# Altium PCB PCB_SmartTerminal_2024-09-08.pcbdoc
Units mil, origin at the board's own origin, x right, y up, seen from the top; angles counter-clockwise.
Board outline 3435 x 4235 mil, 2 copper layers (Top Layer, Bottom Layer); 13 components, 18 nets, 138 pads, 15 vias.
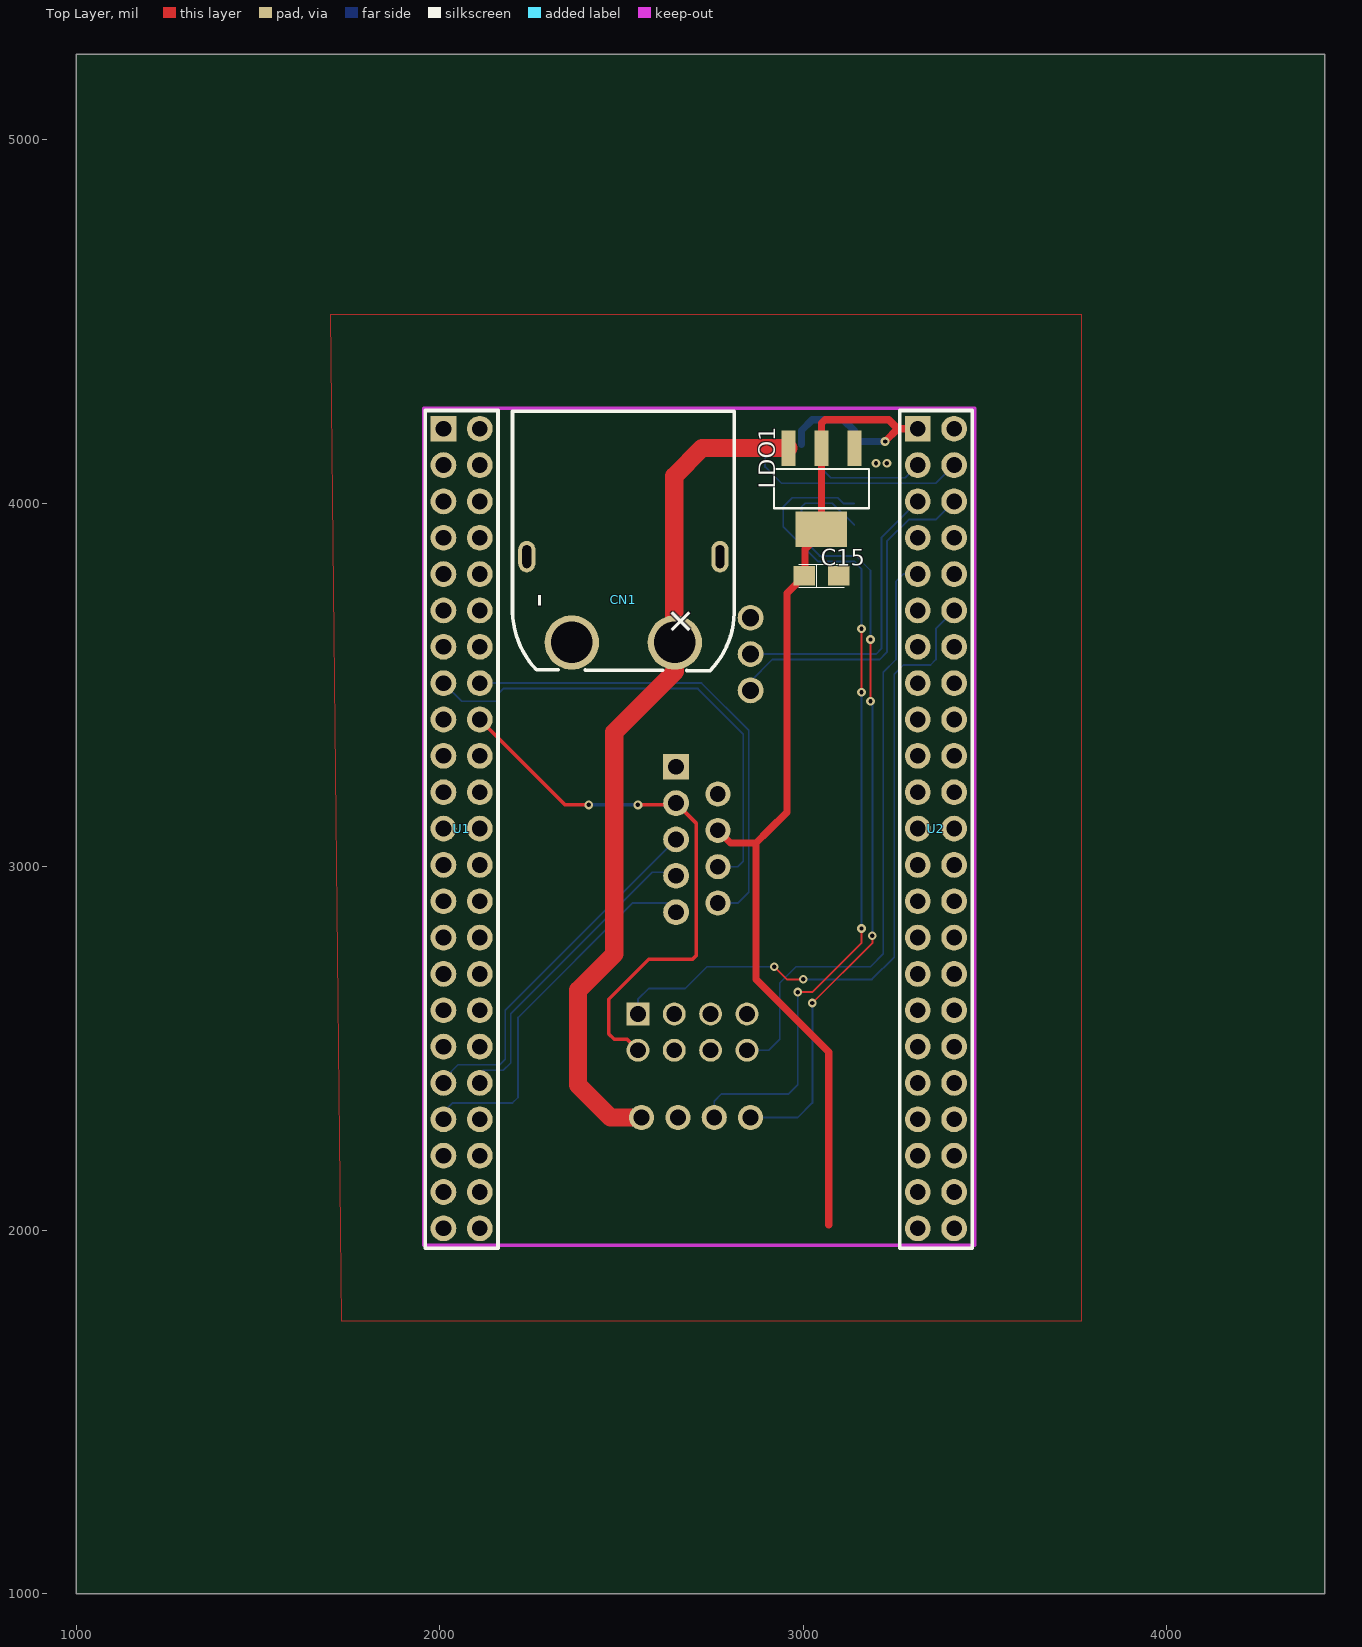
[diagram p0: Top Layer view]
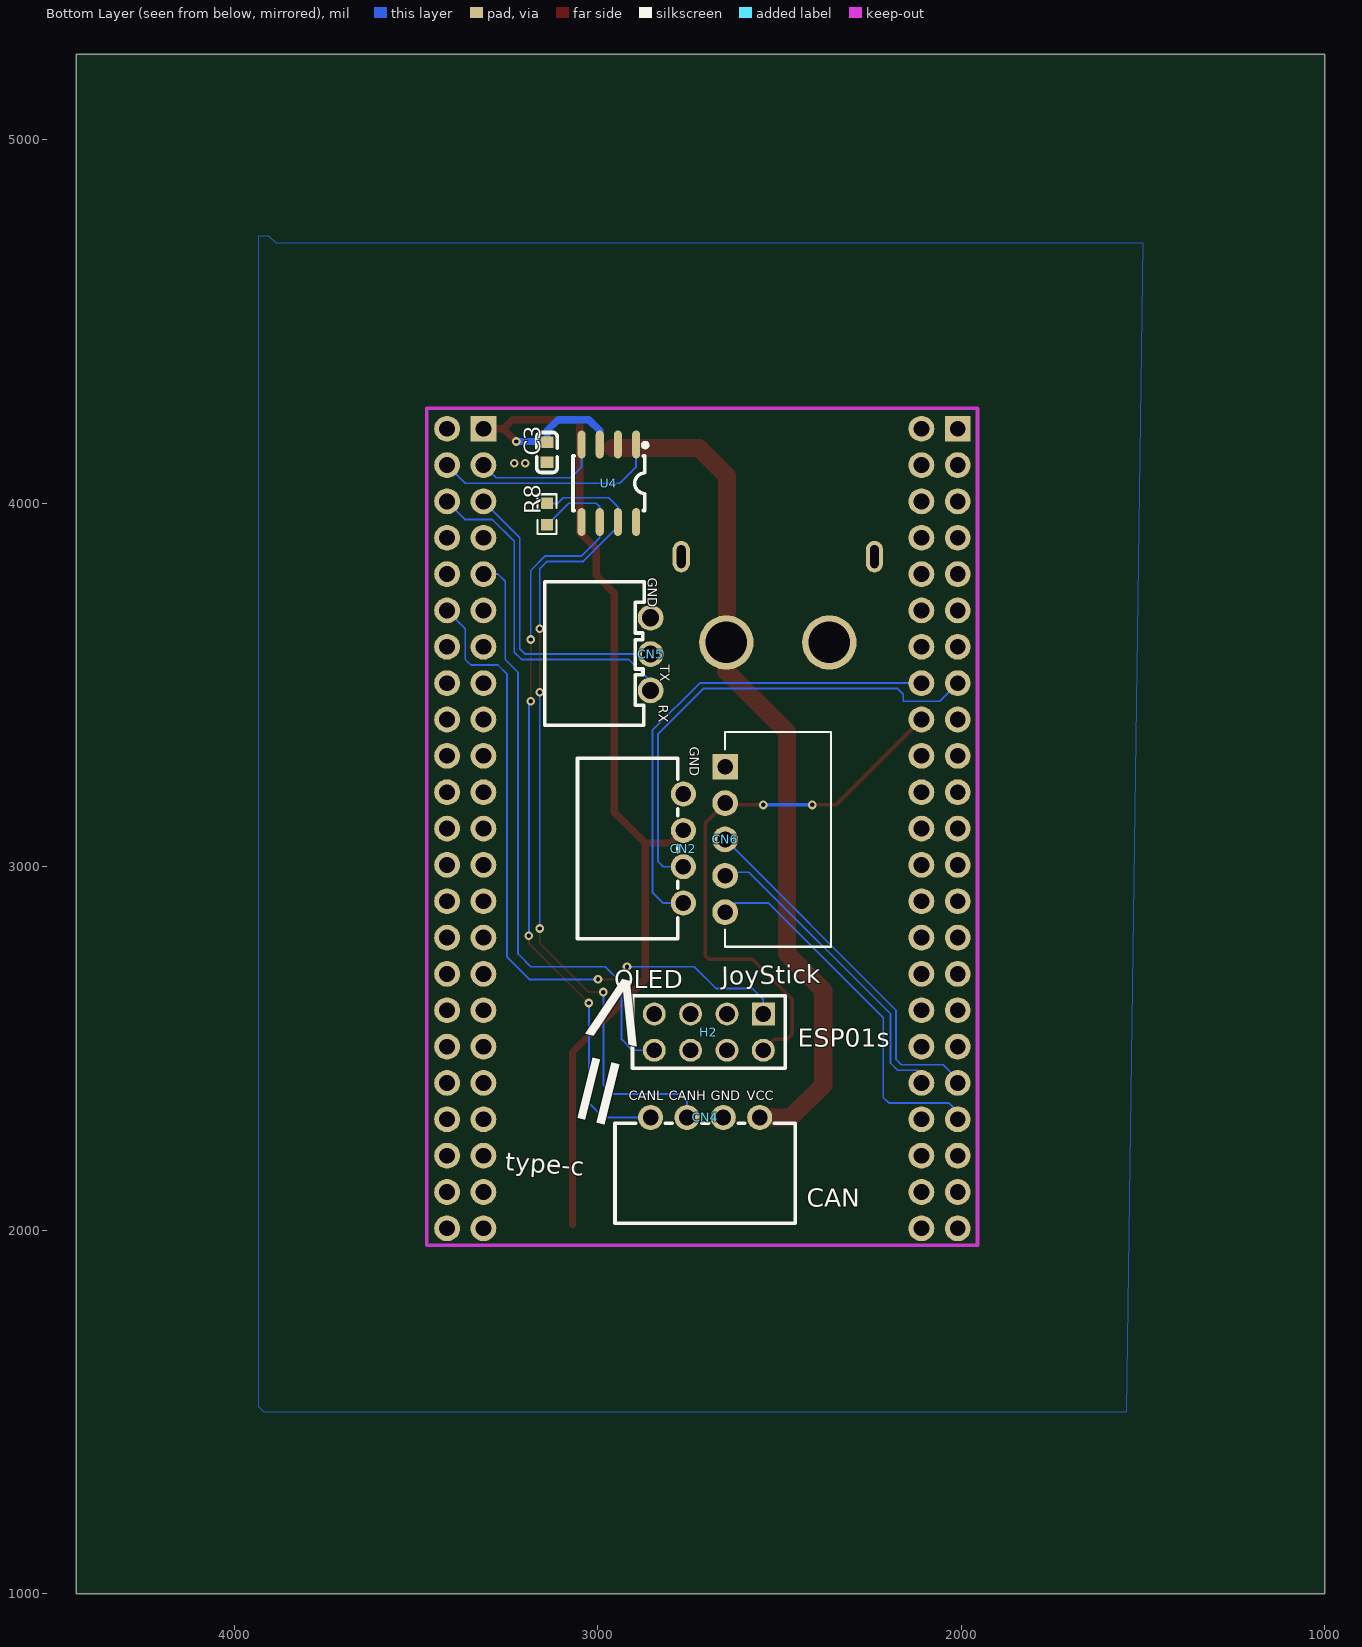
[diagram p1: Bottom Layer view, seen from below]

## Layer stack, top to bottom
Top Layer: signal copper (thickness not stored)
Dielectric: dielectric 12.6, FR-4, Dk 4.8
Bottom Layer: signal copper (thickness not stored)

## Board outline
4435,1000 1000,1000 1000,5235 4435,5235

## Components (designator, comment, footprint, x,y, rotation, side; value= is the part's Value field where it differs from the comment)
C3 "0.1uF" C0603 3140,4140 r270 bottom
C15 "10uF" CASE-A_3216 3050,3800 r0 top
CN1 "XT60PW-M" CONN-TH_XT60PW-M 2505,3735 r270 top
CN2 "2.54-4P" CONN-TH_XH-4AW 2765,3050 r90 bottom
CN4 "2.54-4P" CONN-TH_XH-4AW 2705,2310 r0 bottom
CN5 "2.54-3P" CONN-TH_3P-P2.54_HCTL_XH-3AW 2855,3585 r270 bottom
CN6 "2.54-5P" CONN-TH_5P-P2.54_XH-5AW_C2908614 2650,3075 r90 bottom
H2 "2x4p" HDR-TH_8P-P2.54-V-F-R2-C4-S2.54 2695,2545 r180 bottom
LDO1 "SPX1117-5V" SOT-223-4_L6.5-W3.5-P2.30-LS7.0-BR 3050,4040 r90 top
R8 "120R" R0603 3140,3970 r270 bottom
U1 "2X23P" HDR-TH_46P-P2.54-V-M-R2-C23-S2.54 2060,3105 r270 top
U2 "2X23P" HDR-TH_46P-P2.54-V-M-R2-C23-S2.54 3365,3105 r270 top
U4 "TJA1050T" SOIC-8_L5.0-W4.0-P1.27-LS6.0-BL 2970,4055 r180 bottom

## Footprints (in the part's own frame and the unit in brackets; to place one, negate y for a bottom-side part, rotate by r counter-clockwise, add the part's x,y. Pads: shape width x height; smd on the part's side, far side on the other; paste and mask are expansions set on the pad)
C0603 [mm]
  rect 0.8x0.9 smd paste+0 mask+0.051: 1(0.7,0) 2(-0.7,0)
  silkscreen extent -1.39,-0.72 1.41,0.71
CASE-A_3216 [mm]
  rect 1.5x1.359 smd paste+0 mask+0.051: 1(-1.2,0) 2(1.2,0)
  silkscreen extent -1.6,-0.8 1.6,0.8
CONN-TH_3P-P2.54_HCTL_XH-3AW [mm]
  round 1.8 hole 1.199 paste+0 mask+0.051: 1(2.54,0) 2(-0.001,0) 3(-2.54,0)
  silkscreen extent -5.04,-7.4 4.98,-0.46
CONN-TH_5P-P2.54_XH-5AW_C2908614 [mm]
  rect 1.8x1.8 hole 1.1 paste+0 mask+0.05: 1(5.08,0)
  round 1.8 hole 1.1 paste+0 mask+0.05: 2(2.54,0) 3(0,0) 4(-2.54,0) 5(-5.08,0)
  silkscreen extent -7.5,-7.4 7.5,0
CONN-TH_XH-4AW [mm]
  round 1.75 hole 1.1 paste+0 mask+0.05: 1(3.81,0) 2(1.27,0) 3(-1.27,0) 4(-3.81,0)
  silkscreen extent -6.3,0.4 6.3,7.4
CONN-TH_XT60PW-M [mm]
  round 3.8 hole 2.9 paste+0 mask+0.05: 1(3,-3.6) 2(3,3.6)
  oval 2.2x1.2 hole 0.6 slot 1.6 at 0 deg paste+0 mask+0.05: 3(-3,6.75) 4(-3,-6.75)
  silkscreen extent -13.17,-7.75 4.96,7.75
HDR-TH_8P-P2.54-V-F-R2-C4-S2.54 [mm]
  rect 1.6x1.6 hole 1.1 paste+0 mask+0.051: 1(3.81,1.27)
  round 1.6 hole 1.1 paste+0 mask+0.051: 2(3.81,-1.27) 3(1.27,1.27) 4(1.27,-1.27) 5(-1.27,1.27) 6(-1.27,-1.27) 7(-3.81,1.27) 8(-3.81,-1.27)
  silkscreen extent -5.33,-2.54 5.33,2.54
HDR-TH_46P-P2.54-V-M-R2-C23-S2.54 [mm]
  rect 1.8x1.8 hole 1.1 paste+0 mask+0.051: 1(-27.94,-1.27)
  round 1.8 hole 1.1 paste+0 mask+0.051: 2(-27.94,1.27) 3(-25.4,-1.27) 4(-25.4,1.27) 5(-22.86,-1.27) 6(-22.86,1.27) 7(-20.32,-1.27) 8(-20.32,1.27) 9(-17.78,-1.27) 10(-17.78,1.27) 11(-15.24,-1.27) 12(-15.24,1.27) 13(-12.7,-1.27) 14(-12.7,1.27) 15(-10.16,-1.27) 16(-10.16,1.27) 17(-7.62,-1.27) 18(-7.62,1.27) 19(-5.08,-1.27) 20(-5.08,1.27) 21(-2.54,-1.27) 22(-2.54,1.27) 23(0,-1.27) 24(0,1.27) 25(2.54,-1.27) 26(2.54,1.27) 27(5.08,-1.27) 28(5.08,1.27) 29(7.62,-1.27) 30(7.62,1.27) 31(10.16,-1.27) 32(10.16,1.27) 33(12.7,-1.27) 34(12.7,1.27) 35(15.24,-1.27) 36(15.24,1.27) 37(17.78,-1.27) 38(17.78,1.27) 39(20.32,-1.27) 40(20.32,1.27) 41(22.86,-1.27) 42(22.86,1.27) 43(25.4,-1.27) 44(25.4,1.27) 45(27.94,-1.27) 46(27.94,1.27)
  silkscreen extent -29.21,-2.54 29.34,2.54
R0603 [mil]
  rect 31.75x34.02 smd paste-3937.01 mask+2: 1(29.66,0) 2(-29.66,0)
  silkscreen extent -55,-26 55,26
SOIC-8_L5.0-W4.0-P1.27-LS6.0-BL [mil]
  oval 22.38x76.78 smd paste+0 mask+2: 1(75,106.5) 2(25,106.5) 3(-25,106.5) 4(-75,106.5) 5(-75,-106.5) 6(-25,-106.5) 7(25,-106.5) 8(75,-106.5)
  silkscreen extent -98,-75 106,111
SOT-223-4_L6.5-W3.5-P2.30-LS7.0-BR [mm]
  rect 2.47x0.98 smd paste+0 mask+0.051: 1(2.835,-2.3) 2(2.835,0) 3(2.835,2.3)
  rect 2.47x3.6 smd paste+0 mask+0.051: 4(-2.835,0)
  silkscreen extent -1.37,-3.33 1.37,3.33

## Via types
v1: diameter 24, hole 12, Top Layer to Bottom Layer, tented both sides, 15 vias

## Nets (pads, with @x,y where several pads share a name; then routed paths per layer and width w, separated by ;. In a path a pad name is that pad's centre, name@x,y a point inside that pad or via, vN(x,y) a via of type N, cw(c..) or ccw(c..) an arc to the next point about the centre after c; other vN are vias at no path point)
+3.3V: CN6.2 H2.2 U1.18 | length 1565.5
  Top Layer w10: U1.18 2345,3170 v1(2410,3170) ; H2.2 2515,2525 2480,2525 2465,2540 2465,2635 2575,2745 2695,2745 2705,2755 2705,3120 CN6.2 2645,3170 v1(2545,3170)
  Bottom Layer w10: v1(2410,3170) v1(2545,3170)
+5V: C3.2 C15.1 CN2.2 LDO1.2 LDO1.4 U2.1 U4.3 | length 3137.7
  Top Layer w20: CN2.2 2800,3065 2870,3065 ; 3070,2015 3070,2490 2870,2690 2870,3065 ; v1(3225,4170) 3260,4205 ; U2.1 3260,4205 ; 2870,3065 2905,3100 2955,3150 2955,3752.24 C15.1 3005,3802.24 3005,3875 3050,3920 LDO1.4 LDO1.2 3050,4220 3060,4230 3235,4230 3260,4205
  Bottom Layer w20: U4.3 2995,4200 3025,4230 3110,4230 3140,4200 C3.2 3142.44,4170 v1(3225,4170)
CAN_RX: U2.3 U4.4 | length 358.4
  Bottom Layer w5: U4.4 3045,4100 3075,4070 3280,4070 U2.3
CAN_TX: U2.4 U4.1 | length 620.9
  Bottom Layer w5: U4.1 2895,4100 2940,4055 3365,4055 U2.4
CANH: CN4.2 R8.2 U4.7 | length 2338.9
  Top Layer w5: v1(2985,2655) 3025,2655 3160,2790 v1(3160,2830) ; v1(3160,3480) v1(3160,3655)
  Bottom Layer w5: CN4.2 2755,2355 2775,2375 2960,2375 2985,2400 v1(2985,2655) ; R8.2 3110.34,3999.66 3095,4015 2970,4015 2945,3990 U4.7 2945,3935 3040,3840 3140,3840 3160,3820 v1(3160,3655) ; v1(3160,2830) v1(3160,3480)
CANL: CN4.1 R8.1 U4.6 | length 2223
  Top Layer w5: v1(3025,2625) 3190,2790 v1(3190,2810) ; v1(3185,3455) v1(3185,3625)
  Bottom Layer w5: CN4.1@2855,2325 CN4.1 2985,2310 3025,2350 v1(3025,2625) ; R8.1 3080,4000 3005,4000 2995,3990 U4.6 2995,3905 3045,3855 3145,3855 3185,3815 v1(3185,3625) ; v1(3185,3455) 3190,3450 v1(3190,2810)
GND: C3.1 C15.2 CN1.1 CN2.1 CN4.3 CN5.3 CN6.1 H2.7 LDO1.1 U1.24 U2.45 U4.2 U4.8
  other v1: 3200,4110 3230,4110
S$1126: 
SCL: CN2.3 U1.15 | length 1349.9
  Bottom Layer w5: U1.15 2060,3455 2160,3455 2160,3475 2175,3490 2710,3490 2835,3365 2835,3015 2820,3000 CN2.3
SDA: CN2.4 U1.16 | length 1336.3
  Bottom Layer w5: U1.16 2720,3505 2850,3375 2850,2930 2820,2900 CN2.4
SW: CN6.5 U1.39 | length 1037.4
  Bottom Layer w5: U1.39 2010,2325 2035,2350 2200,2350 2215,2365 2215,2585 2530,2900 2625,2900 CN6.5
USART6_RX: H2.8 U2.9 | length 1683.3
  Bottom Layer w5: H2.8 2905,2495 2935,2525 2935,2680 2980,2725 3185,2725 3220,2760 3220,3535 3255,3570 3255,3785 3275,3805 U2.9
USART6_TX: H2.1 U2.12 | length 1888.2
  Top Layer w5: v1(2920,2725) 2955,2690 v1(3000,2690)
  Bottom Layer w5: H2.1 2545,2635 2575,2665 2675,2665 2735,2725 v1(2920,2725) ; v1(3000,2690) 3188.84,2690 3250,2751.16 3250,3530 3275,3555 3350,3555 3365,3570 3365,3655 U2.12
USART_RX: CN5.1 U2.6 | length 968.7
  Bottom Layer w5: CN5.1 2855,3510 2915,3570 3210,3570 3230,3590 3230,3895 3290,3955 3365,3955 U2.6
USART_TX: CN5.2 U2.5 | length 812.6
  Bottom Layer w5: CN5.2 3200,3585 3215,3600 3215,3905 U2.5
VCC: CN1.2 CN4.4 LDO1.3 | length 2344.7
  Top Layer w50: CN4.4 2470,2310 2380,2400 2380,2660 2480,2760 2480,3370 2646.73,3536.73 CN1.2 2645,3618.62 2645,4075 2721.61,4151.61 LDO1.3
VRX: CN6.3 U1.37 | length 1002.5
  Bottom Layer w5: U1.37 2010,2415 2050,2455 2165,2455 2180,2470 2180,2605 CN6.3
VRY: CN6.4 U1.38 | length 878.1
  Bottom Layer w5: U1.38 2110,2430 2120,2440 2175,2440 2195,2460 2195,2595 2585,2985 2640,2985 CN6.4
pads on no net: CN1.3 CN1.4 H2.3 H2.4 H2.5 H2.6 U1.1 U1.2 U1.3 U1.4 U1.5 U1.6 U1.7 U1.8 U1.9 U1.10 U1.11 U1.12 U1.13 U1.14 U1.17 U1.19 U1.20 U1.21 U1.22 U1.23 U1.25 U1.26 U1.27 U1.28 U1.29 U1.30 U1.31 U1.32 U1.33 U1.34 U1.35 U1.36 U1.40 U1.41 U1.42 U1.43 U1.44 U1.45 U1.46 U2.2 U2.7 U2.8 U2.10 U2.11 U2.13 U2.14 U2.15 U2.16 U2.17 U2.18 U2.19 U2.20 U2.21 U2.22 U2.23 U2.24 U2.25 U2.26 U2.27 U2.28 U2.29 U2.30 U2.31 U2.32 U2.33 U2.34 U2.35 U2.36 U2.37 U2.38 U2.39 U2.40 U2.41 U2.42 U2.43 U2.44 U2.46 U4.5

## Polygon pours and split planes (outlines as drawn)
GND on Bottom Layer (solid): 1500,4715 3885,4715 3905,4735 3935,4735 3935,1515 3920,1500 1545,1500
GND on Top Layer (solid): 1700,4520 3765,4520 3765,1750 1730,1750

## Silkscreen, mask and mechanical layers (free items; w line width, h text height)
Bottom Overlay:
  text "GND" at 2863,3795.05 h26 r90
  text "TX" at 2828,3555 h26 r90
  text "RX" at 2833,3445 h26 r90
  text "JoyStick" at 2659.56,2675 h50 r359
  text "OLED" at 2955,2665 h50
  text "ESP01s" at 2450,2505 h50
  text "VCC" at 2590,2357 h26
  text "GND" at 2690,2357 h26
  text "CANH" at 2805,2357 h26
  text "CANL" at 2915,2357 h26
  text "=>" at 2942.97,2250.81 h200 r284
  text "type-c" at 3256.83,2164.97 h50 r4
  text "CAN" at 2425,2065 h50

## Text inside footprints (layer, text, board x,y; h text height)
CN1: Top Overlay "-" at 2305,3713.11 h80 r90; Top Overlay "+" at 2671.72,3731.39 h80 r225
CN6: Bottom Overlay "GND" at 2748,3330 h26 r90